# EAGLE board Esquema (EAGLE 9.6.2)
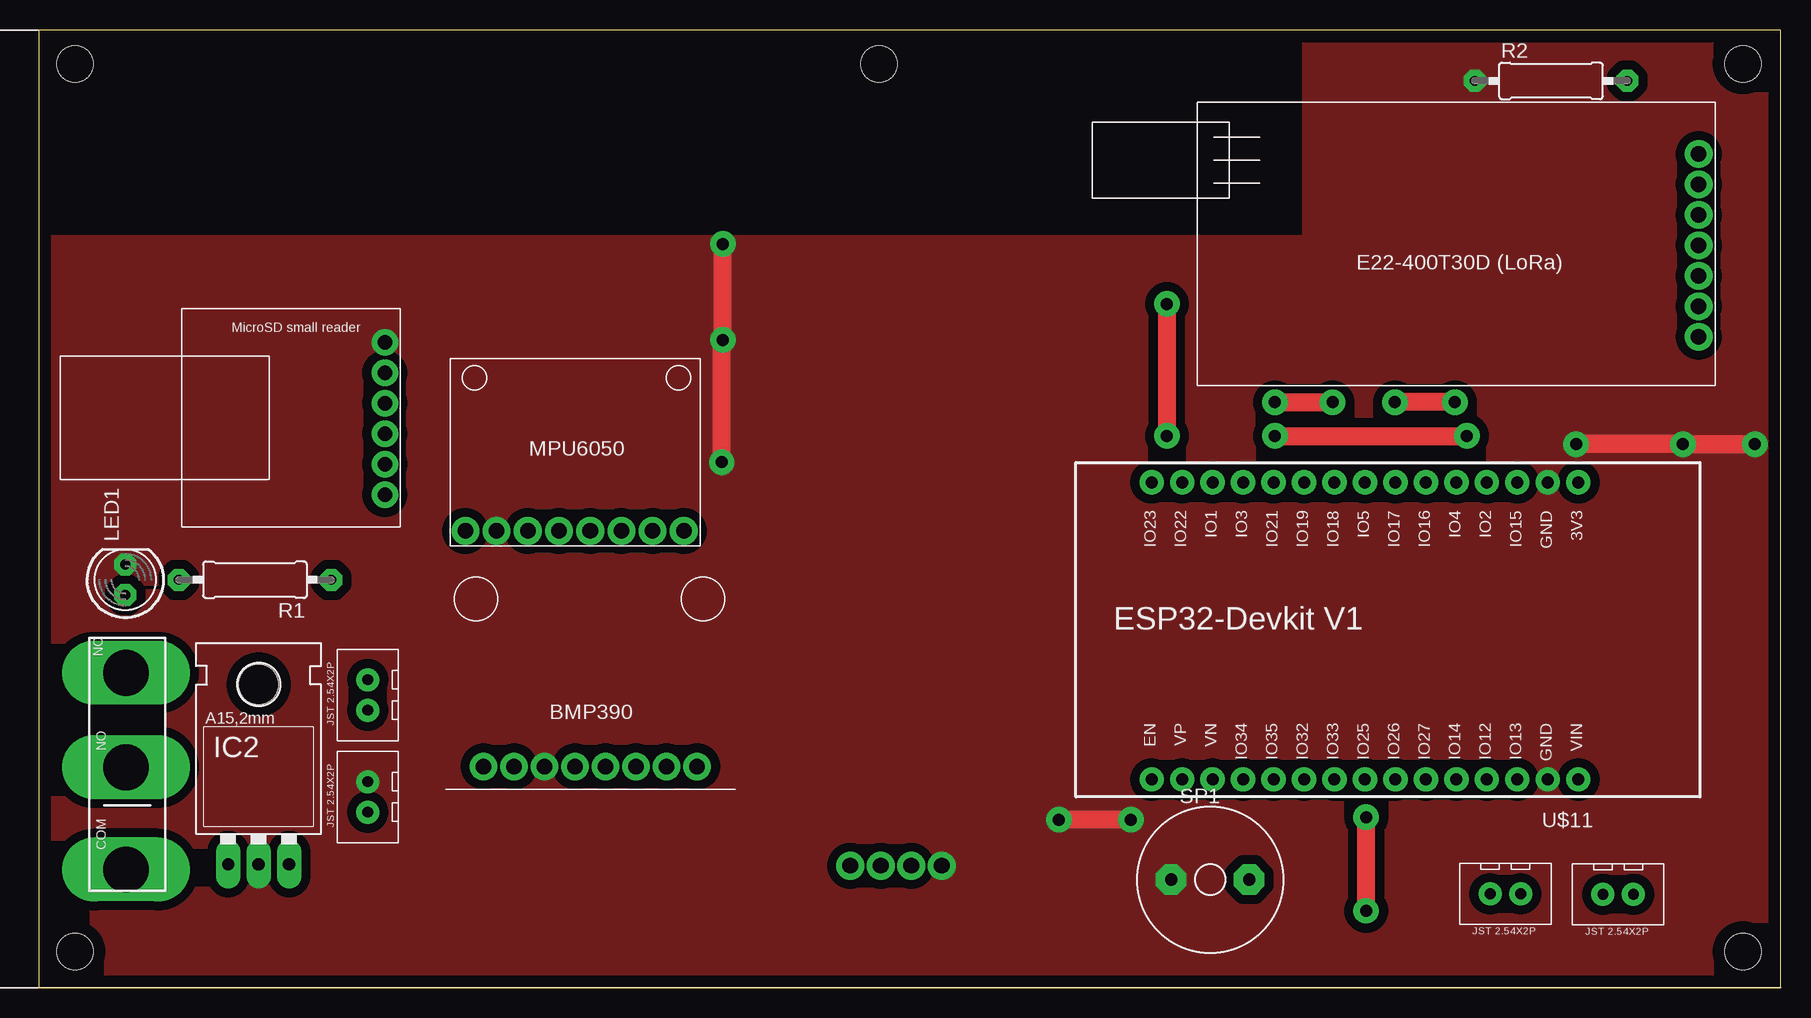
[diagram p0: board, top side]
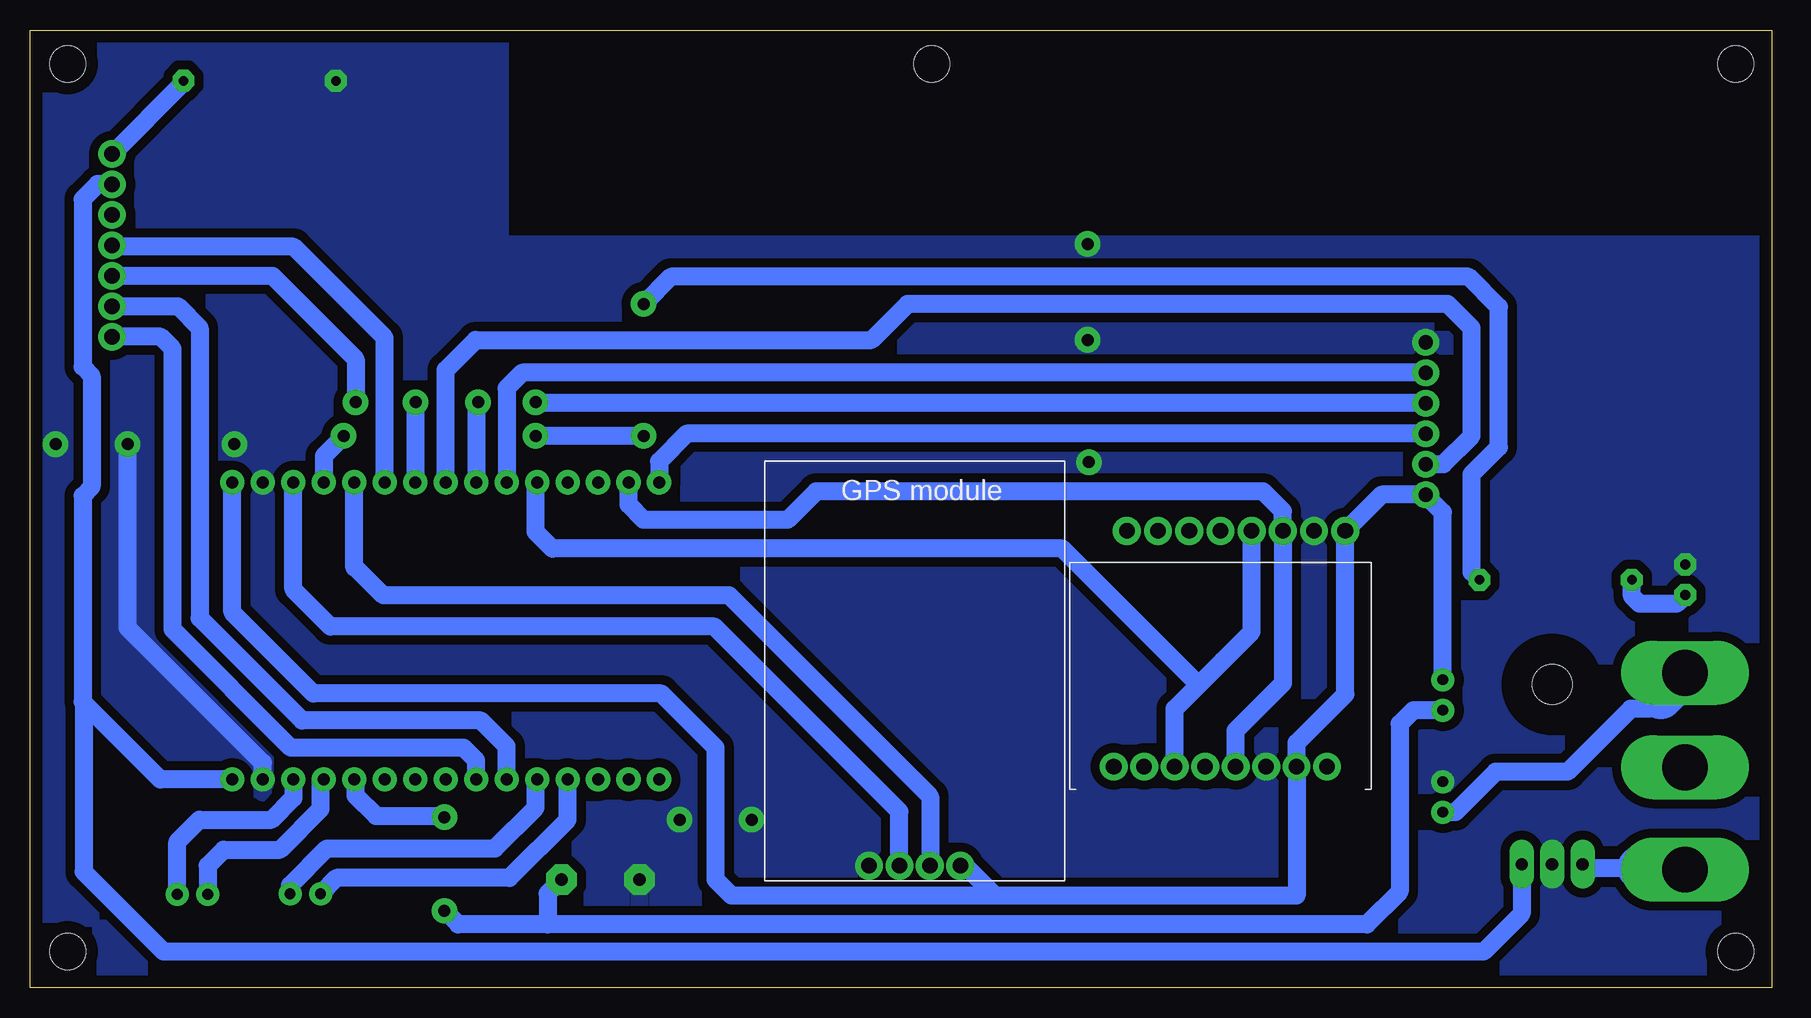
[diagram p1: board, bottom side, seen from below]

Size 145.14 x 79.84 mm. Coordinates in mm from the lower left corner, seen from the top.
Outline: 0,0 145.14,0 145.14,79.84 0,79.84 0,0
Copper layers (1*16): Top 0.035mm / dielectric 1.5mm / Bottom 0.035mm
Design rules "default *": minimum track width 1.5mm, minimum drill 1mm, track to track 30mil, track to pad 20mil, pad to pad 6mil, via to via 6mil, smd to smd 6mil, copper to edge 40mil, drill to drill 6mil, minimum pad ring 20mil, minimum via ring 22mil, stop-mask expansion 4mil, vias tented up to drill 0mil, thermal gap 0mil
Holes 3 mm at 142,77 142,3 3,3 3,77 70,77

## Footprints (pad centres in the part's own frame; a part is rotated, then mirrored left to right if it is on the bottom)
78XXL = drill 1.016 long: GND 0,-3.81; IN -2.54,-3.81; OUT 2.54,-3.81 | hole 3.302: 0,11.176
LED5MM = drill 0.813 octagon: A -1.27,0; K 1.27,0
0309/12 = drill 0.813 octagon: 1 -6.35,0; 2 6.35,0
AL60P = drill 1.016 pad 2.54 octagon: 1 -3.251,0; 2 3.251,0
BMP390_FOOTPRINT = drill 1.3: 3V0 -5.969,-8.382; CS 6.731,-8.382; GND -3.429,-8.382; INT 9.271,-8.382; SCL -0.889,-8.382; SDA 4.191,-8.382; SDO 1.651,-8.382; VIN -8.509,-8.382
E22-400T30D_FOOTPRINT = drill 1.3: AUX -16.383,-0.762; GND -16.383,-5.842; M0 -16.383,9.398; M1 -16.383,6.858; RXD -16.383,4.318; TXD -16.383,1.778; VCC -16.383,-3.302
GPS_MODULE_FOOTPRINT = drill 1.3: GND -4.01,-16.51; RX 1.07,-16.51; TX -1.47,-16.51; VCC 3.61,-16.51
JST2.54X2P_FOOTPRINT = drill 0.9: 1 -1.27,0; 2 1.27,0
MICROSD_SMALL_READER_FOOTPRINT = drill 1.2: 3V3 -7.239,6.35; CLK -7.239,-1.27; CS -7.239,3.81; GND -7.239,-6.35; MISO -7.239,-3.81; MOSI -7.239,1.27
MPU6050_FOOTPRINT = drill 1.3: ADO 6.686,-10.184; GND -6.314,-10.184; INT 9.286,-10.184; SCL -3.715,-10.184; SDA -1.115,-10.184; VCC -8.915,-10.184; XCL 4.085,-10.184; XDA 1.486,-10.184
ESP32-DEVKITV1 = drill 1 pad 1.93: 1 -22.87,-13.54; 2 -20.33,-13.54; 3 -17.79,-13.54; 4 -15.25,-13.54; 5 -12.71,-13.54; 6 -10.17,-13.54; 7 -7.63,-13.54; 8 -5.09,-13.54; 9 -2.55,-13.54; 10 -0.01,-13.54; 11 2.53,-13.54; 12 5.07,-13.54; 13 7.61,-13.54; 14 10.15,-13.54; 15 12.69,-13.54; 16 12.69,11.23; 17 10.15,11.23; 18 7.61,11.23; 19 5.07,11.23; 20 2.53,11.23; 21 -0.01,11.23; 22 -2.55,11.23; 23 -5.09,11.23; 24 -7.63,11.23; 25 -10.17,11.23; 26 -12.71,11.23; 27 -15.25,11.23; 28 -17.79,11.23; 29 -20.33,11.23; 30 -22.87,11.23
CHAVESS-5GL = drill 3.8 pad 3.048 long: P$1 -9.144,0.762; P$2 -0.635,0.762; P$3 7.239,0.762

## Placement (x,y rotation side)
IC2  5V  [78XXL]  18.3,14.1 0 top
LED1  RED  [LED5MM]  7.2,34 90 top
R1  220R  [0309/12]  18,34 180 top
R2  46R  [0309/12]  126,75.6 0 top
SP1  AL60P  [AL60P]  97.6,9 0 top
U$1  BMP390V1  [BMP390_FOOTPRINT]  45.56,26.81 0 top
U$2  E22-400T30D  [E22-400T30D_FOOTPRINT]  121.92,63.66 180 top
U$3  GPS_MODULE  [GPS_MODULE_FOOTPRINT]  71.22,26.67 0 bottom
U$4  JST2.54X2P  [JST2.54X2P_FOOTPRINT]  27.4,24.4 90 top
U$5  JST2.54X2P  [JST2.54X2P_FOOTPRINT]  122.2,7.82 180 top
U$6  JST2.54X2P  [JST2.54X2P_FOOTPRINT]  131.6,7.78 180 top
U$7  JST2.54X2P  [JST2.54X2P_FOOTPRINT]  27.4,15.9 90 top
U$8  MICROSD_SMALL_READER  [MICROSD_SMALL_READER_FOOTPRINT]  21.59,47.45 180 top
U$9  MPU6050V1  [MPU6050_FOOTPRINT]  44.45,48.26 0 top
U$11  ESP32DEVKITV1  [ESP32-DEVKITV1]  105.41,28.59 180 top
U$12  CHAVE_SS-5GL  [CHAVESS-5GL]  8,19 90 top

## Library data of the parts
IC2 = v-reg
LED1 = led
R1 R2 = rcl; SPICEPREFIX: R
SP1 = buzzer; OC_FARNELL: unknown; OC_NEWARK: unknown
U$1-U$9 U$12 = CRD
U$11 = ESP32-DEVKITV1

## Nets
3V3: U$1.3V0 U$3.VCC U$4.2 U$8.3V3 U$9.VCC U$11.1
BUZZER: SP1.2 U$4.1 U$11.26
CLK: U$8.CLK U$11.9
CS: U$8.CS U$11.8
GND: IC2.GND LED1.K R2.1 SP1.1 U$1.GND U$3.GND U$7.2 U$8.GND U$9.GND U$11.2 U$11.29
LED1: R1.1 U$11.4
M0: U$2.M0 U$11.22
M1: U$2.M1 U$11.21
MISO: U$8.MISO U$11.10
MOSI: U$8.MOSI U$11.15
N$4: LED1.A R1.2
N$7: R2.2 U$2.GND
OPTOACOPLADOR1: U$5.1 U$11.20
OPTOACOPLADOR2: U$5.2 U$11.19
RX1: U$3.TX U$11.3
RX2: U$2.TXD U$11.6
SCL: U$1.SCL U$9.SCL U$11.14
SDA: U$1.SDA U$9.SDA U$11.11
SKIB1: U$6.1 U$11.28
SKIB2: U$6.2 U$11.27
TX1: U$3.RX U$11.5
TX2: U$2.RXD U$11.7
V_BATTERY: U$7.1 U$12.P$3
VIN: IC2.IN U$12.P$1
VOUT: IC2.OUT U$2.VCC U$11.30

## Tracks (layer width: path | path; a pad name or v marks a point on that pad's centre or on a via)
3V3
  Bottom 1.5: U$11.1 128.28,31.28 121.52,24.52 92.52,24.52 88,20 88,9 86.66,7.66 64.71,7.66 | U$4.2 27.4,39.62 28.85,41.08 U$8.3V3 32.51,41.1 U$9.VCC 35.53,24.46 39.59,20.41 U$1.3V0 39.59,7.66 64.71,7.66 | U$3.VCC 67.21,10.16 64.71,7.66
BUZZER  (via drill 1)
  Top 1.5: v110.6,6.4 v110.6,14.2
  Bottom 1.5: U$11.26 118,17.24 118,16 116.3,14.3 110.7,14.3 v110.6,14.2 | U$4.1 29.87,23.13 31,22 31,8 33.74,5.26 102,5.26 | v110.6,6.4 109.46,5.26 102,5.26 | SP1.2 102,7.85 102,5.26
CLK  (via drill 1)
  Top 1.5: v103,48.8 v107.8,48.8
  Bottom 1.5: U$8.CLK 102.92,48.72 v103,48.8 | v107.8,48.8 107.96,48.64 U$11.9
CS
  Bottom 1.5: U$11.8 110.5,51.5 108,54 75,54 72,57 27,57 25,55 25,46 27.36,43.64 U$8.CS
GND  (via drill 1)
  Top 1.5: v91,14 v85,14 | v56.9,43.8 56.9,53.9 v57,54 v57,62 | v128.1,45.3 v137,45.3 v143,45.3
  Bottom 1.5: U$11.29 125.74,18.74 137,30 v137,45.3
  pour Bottom: 1,1 146,1 146,79 106,79 106,62 1,62
  pour Top: 1,62 1,1 145,1 145,79 106,79 106,62
LED1  (via drill 1)
  Top 1.5: v94,57 v94,46 | v103,46 v119,46
  Bottom 1.5: R1.1 25,34.65 25,42.8 22.74,45.06 22.74,56.74 25.26,59.26 91.74,59.26 v94,57 | v94,46 99,46 v103,46 | v119,46 120.66,44.34 U$11.4
M0
  Bottom 1.5: U$11.22 107.96,18.96 109,20 123.4,20 133.26,29.86 133.26,53.26 134.26,54.26 U$2.M0
M1
  Bottom 1.5: U$11.21 105.42,20.12 107.56,22.26 122.46,22.26 131,30.8 131,55 132.8,56.8 U$2.M1
MISO
  Bottom 1.5: U$8.MISO 104.14,51.26 105.42,49.98 U$11.10
MOSI
  Bottom 1.5: U$8.MOSI 90.42,46.18 92.72,43.88 U$11.15
N$4
  Bottom 1.5: LED1.A 7.93,32 11,32 11.65,32.65 R1.2
N$7
  Bottom 1.5: R2.2 132.35,75.45 U$2.GND
OPTOACOPLADOR1
  Bottom 1.5: U$11.20 103,17.24 103,15 106.4,11.6 120.4,11.6 123.47,8.53 U$5.1
OPTOACOPLADOR2
  Bottom 1.5: U$11.19 100.34,14 105.2,9.14 119.61,9.14 U$5.2
RX1
  Bottom 1.5: U$3.TX 72.69,14.69 88.1,30.1 120.1,30.1 123.2,33.2 U$11.3
RX2
  Bottom 1.5: U$2.TXD 138.19,61.77 123.17,61.77 115.58,54.18 U$11.6
SCL
  Bottom 1.5: U$1.SCL 44.67,21.43 40.74,25.37 U$9.SCL 40.74,39.74 42.38,41.38 79.62,41.38 82,39 94,39 95.26,40.26 U$11.14
SDA
  Bottom 1.5: U$1.SDA 49.75,23.25 47.75,25.25 | U$9.SDA 43.34,29.66 45.75,27.25 47.75,25.25 | 47.75,25.25 59.1,36.6 101.6,36.6 103,38 103,42.01 U$11.11
SKIB1
  Bottom 1.5: U$11.28 123.2,15.8 125,14 131.03,14 132.87,12.16 132.87,12 U$6.1
SKIB2
  Bottom 1.5: U$11.27 120.94,17.08 120.94,14.86 124.3,11.5 129,11.5 130.33,10.17 U$6.2
TX1
  Bottom 1.5: U$3.RX 70.13,10.18 70.13,15.94 86.89,32.7 115.7,32.7 118,35 118.12,35 U$11.5
TX2  (via drill 1)
  Top 1.5: v118,48.8 v113,48.8
  Bottom 1.5: U$2.RXD 124.94,59.34 118,52.4 v118,48.8 | v113,48.8 113.04,48.76 U$11.7
V_BATTERY
  Bottom 1.5: U$7.1 26.37,14.63 23,18 17,18 11.76,23.24 10.24,23.24 9.24,24.24
  Bottom 3.7: U$12.P$3 9.24,24.24
VIN
  Bottom 1.5: IC2.IN 15.47,10 11,10
  Bottom 3.7: U$12.P$1 10.86,9.86 11,10
VOUT
  Bottom 1.5: 140.67,23.75 140.77,23.85 140.77,41 140,41.77 140,51 140.77,51.77 140.77,65.73 139.5,67 138.34,67 U$2.VCC | 140.67,23.75 134.28,17.36 U$11.30 | 140.67,23.75 140.67,9.67 134,3 24,3 20.84,6.16 IC2.OUT